# Altium PCB Controller-Board-Rev5.PcbDoc
Units mm, origin at the board's own origin, x right, y up, seen from the top; angles counter-clockwise.
Board outline 35 x 30 mm, 2 copper layers (Component Side, Bottom Layer), stack 0.325 mm thick; 36 components, 50 nets, 202 pads, 58 vias.
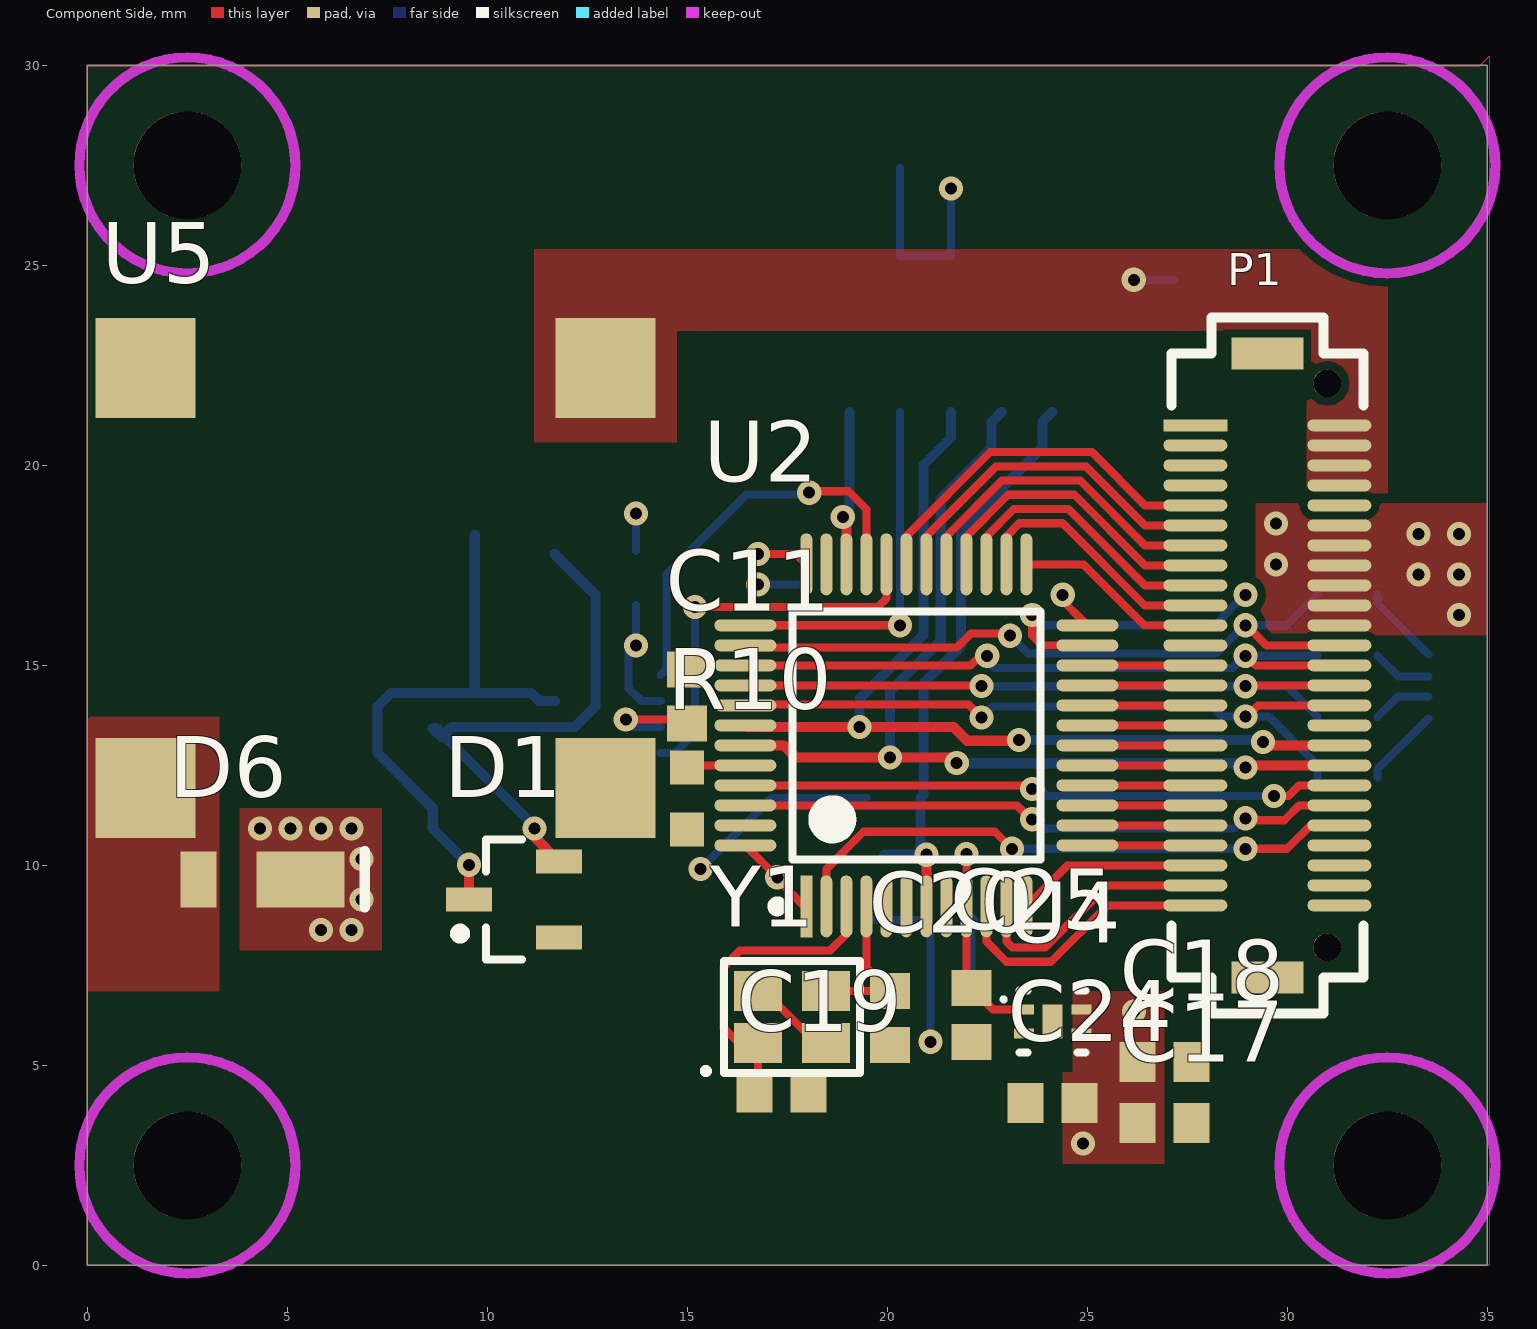
[diagram p0: Component Side view]
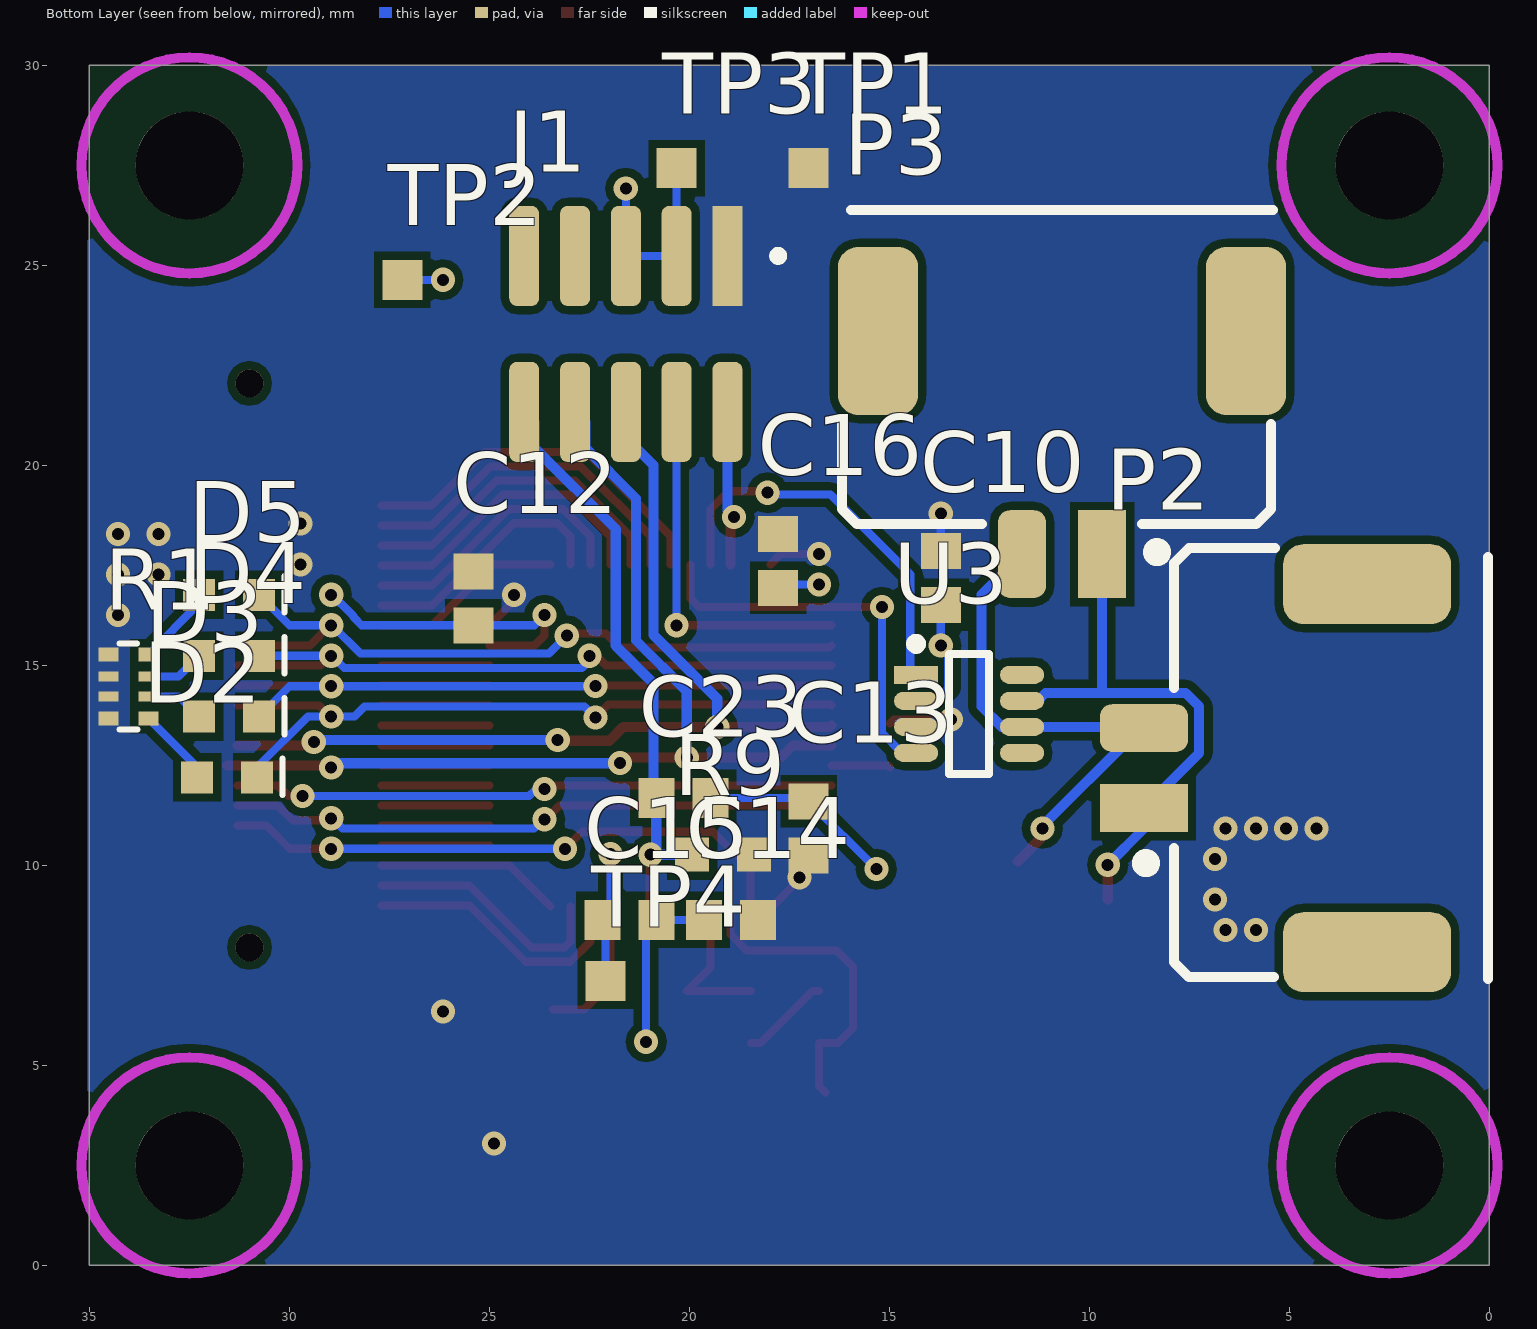
[diagram p1: Bottom Layer view, seen from below]
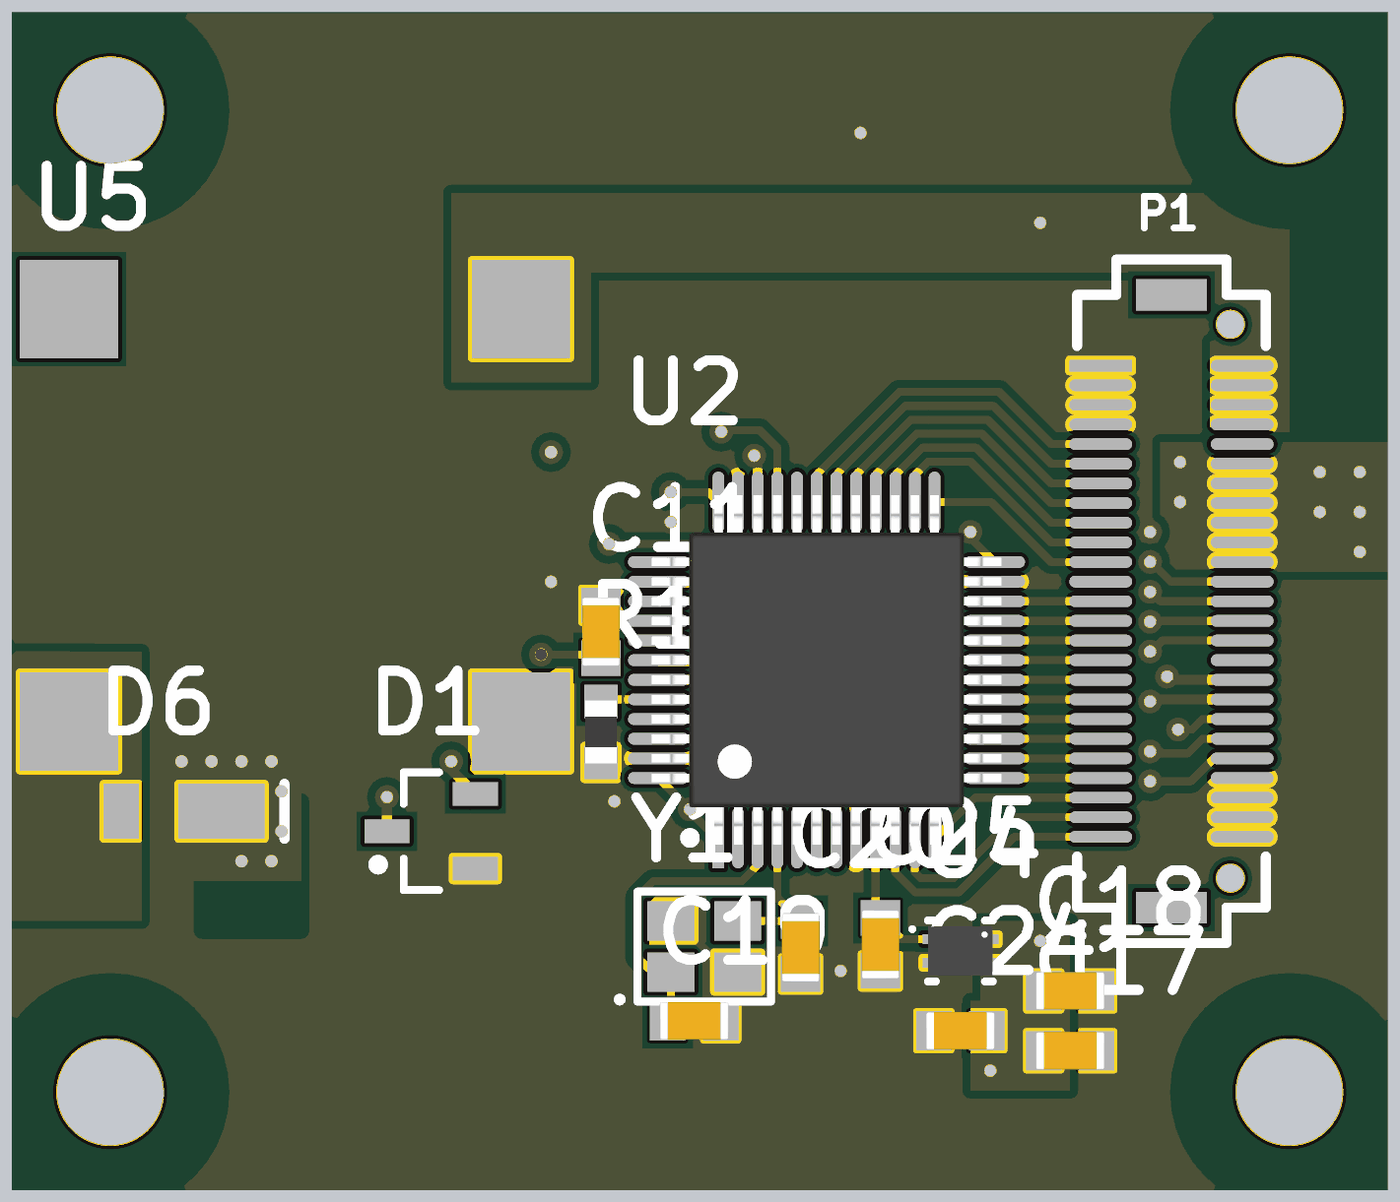
[diagram p2: 3D render of the assembled board from above, using the file's embedded part models]
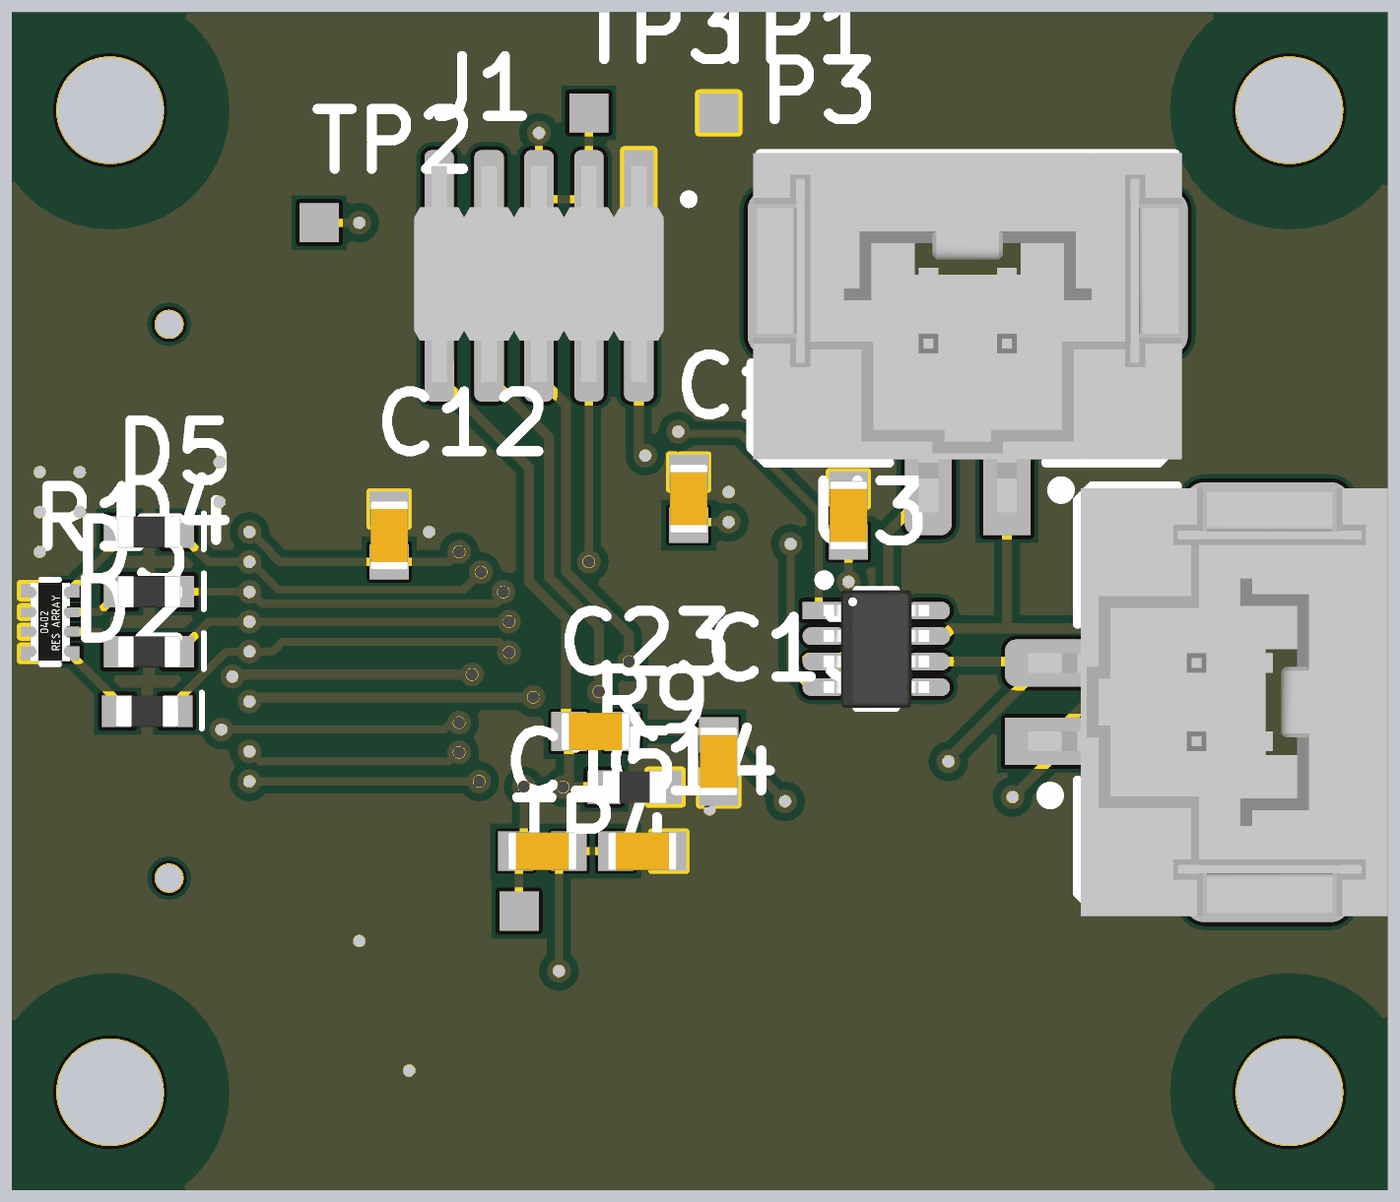
[diagram p3: 3D render of the assembled board from below, using the file's embedded part models]

## Layer stack, top to bottom
Top Solder: solder mask 0.0102, Solder Resist, Dk 3.5
Component Side: signal copper 0.0356
Dielectric 1: core 0.254, FR-4, Dk 4.2
Bottom Layer: signal copper 0.0356
Solder Side: solder mask 0.0102, Solder Resist, Dk 3.5

## Board outline
0,0 35,0 35,30 0,30

## Design rules (kind name [scope] priority, off if disabled: settings)
Clearance [All] p1: gap=0.152 except(0.2: Arc-Poly Track-Poly SMDPad-Poly THPad-Poly Via-Poly Fill-Poly Poly-Poly Poly-Region Poly-Text)
DiffPairsRouting [All] p1: maxlimit=0.254 minlimit=0.254 mostfreqgap=0.254 toplayer_minwidth=0.254 toplayer_maxwidth=0.381 toplayer_prefwidth=0.254 bottomlayer_minwidth=0.254 bottomlayer_maxwidth=0.381 bottomlayer_prefwidth=0.254 maxuncoupledlength=25
HoleSize [All] p1: absolutevalues=TRUE maxlimit=3 minlimit=0.025 maxpercent=80.000 minpercent=20.000
MinimumSolderMaskSliver [All] p1: minsoldermaskwidth=0
PlaneClearance [All] p1: clearance=0.4
PlaneConnect [All] p1: planeconnectstyle=Direct reliefexpansion=0 reliefentries=4 reliefconductorwidth=0.254 reliefairgap=0.254
PolygonConnect PolygonConnect_Relief [HasFootprint('RESC1608X06N') or HasFootprint('Bergstak 50 Pos Receptacle') or HasFootprint('CAPC1608X06N') or HasFootprint('10 POS 1.27MM RECT CONN')] p1: connectstyle=Relief reliefconductorwidth=0.254 reliefentries=4 polygonreliefangle="90 Angle" airgapwidth=0.2
PolygonConnect PolygonConnect_UFDFN [HasFootprint('10-UFDFN')] p2: connectstyle=Direct reliefconductorwidth=0.254 reliefentries=4 polygonreliefangle="90 Angle" airgapwidth=0.254
PolygonConnect PolygonConnect_Via [IsVia] p3: connectstyle=Direct reliefconductorwidth=0.254 reliefentries=4 polygonreliefangle="90 Angle" airgapwidth=0.254
PolygonConnect [All] p4: connectstyle=Direct reliefconductorwidth=0.254 reliefentries=4 polygonreliefangle="90 Angle" airgapwidth=0.254
RoutingVias [All] p1: holewidth=0.3 width=0.605 viastyle="Through Hole" minholewidth=0.3 minwidth=0.605 maxholewidth=6.3 maxwidth=6.605
SilkToSilkClearance [All] p1: silktosilkclearance=0.15
SilkToSolderMaskClearance [IsPad] p1: minsilkscreentomaskgap=0.15 clearancetoexposedcopper=TRUE
SolderMaskExpansion [All] p1: expansion=0.102
Width [All] p1: maxlimit=1.27 minlimit=0.152 preferedwidth=0.203
23 further rules are at their usual default settings.

## Classes and differential pairs
component class Controller_Board_Main: C10 C11 C12 C13 C14 C15 C16 C17 C18 C19 C20 C23 D1 D2 D3 D4 D5 J1 P1 P2 P3 R1 R9 R10 U2 U3 Y1
component class Controller_Board_Power_Supply: C24 C25 D6 TP1 TP2 TP3 TP4 U4 U5 VIN
differential pair CAN: +CAN_P -CAN_N

## Components (designator, comment, footprint, x,y, rotation, side; value= is the part's Value field where it differs from the comment)
C10 "CAP CER 4.7UF 25V 10% X5R 0603" "CAP, 0603" 13.716,17.185 r90 bottom
C11 "CAP CER 0.1UF 50V 10% X7R 0603" "CAP, 0603" 14.986,14.224 r270 top
C12 "CAP CER 0.1UF 50V 10% X7R 0603" "CAP, 0603" 25.4,16.677 r90 bottom
C13 "CAP CER 0.1UF 50V 10% X7R 0603" "CAP, 0603" 17.018,10.922 r270 bottom
C14 "CAP CER 0.1UF 50V 10% X7R 0603" "CAP, 0603" 18.963,8.636 r180 bottom
C15 "CAP CER 0.1UF 50V 10% X7R 0603" "CAP, 0603" 21.503,8.636 r0 bottom
C16 "CAP CER 0.1UF 50V 10% X7R 0603" "CAP, 0603" 17.78,17.613 r90 bottom
C17 "CAP CER 4.7UF 25V 10% X5R 0603" "CAP, 0603" 26.924,3.556 r180 top
C18 "CAP CER 4.7UF 25V 10% X5R 0603" "CAP, 0603" 26.924,5.08 r180 top
C19 "CAP CER 15PF 50V ±5% NPO 0603" "CAP, 0603" 17.359,4.318 r180 top
C20 "CAP CER 15PF 50V ±5% NPO 0603" "CAP, 0603" 20.066,6.183 r90 top
C23 "CAP CER 0.1UF 50V 10% X7R 0603" "CAP, 0603" 20.153,11.684 r0 bottom
C24 "CAP CER 1UF 50V 10% X7R 0603" "CAP, 0603" 24.13,4.064 r180 top
C25 "CAP CER 1UF 50V 10% X7R 0603" "CAP, 0603" 22.098,6.263 r270 top
D1 "DIODE TVS 24VWM 70VC SOT23" SOT23 10.668,9.144 r180 top
D2 "LED BLUE CLEAR 2.8V 0603" LED_0603 32.258,12.192 r180 bottom
D3 "LED BLUE CLEAR 2.8V 0603" LED_0603 32.208,13.706 r180 bottom
D4 "LED GREEN CLEAR 2V 0603" LED_0603 32.208,15.23 r180 bottom
D5 "LED RED CLEAR 2V 0603" LED_0603 32.208,16.754 r180 bottom
D6 "DIODE SCHOTTKY 30V 1A POWERDI123" "DIODE SCHOTTKY 30V 1A POWERDI123" 2.784,9.652 r0 top
J1 "CONN 10POS HEADR MALE 0.05\"" "CONN, 10POS 0.05\" Debug Header" 19.05,25.236 r0 bottom
P1 "CONN 50POS Bergstak Receptacle 0.02\"" "CONN, Bergstak 50 Pos Receptacle" 29.5,15 r0 top locked
P2 "Dura-Clik" "CONN, 2POS Dura-Click Vertical" 8.636,11.43 r90 bottom
P3 "Dura-Clik" "CONN, 2POS Dura-Click Vertical" 9.684,17.78 r0 bottom
R1 "510 OHM" "RES ARRAY 4 POS 0804" 35.028,14.724 r0 bottom
R9 "RES 100K OHM 5% 1/8W 0603" "RES, 0603" 19.157,10.267 r180 bottom
R10 "RES 510 OHM 5% 1/10W 0603" "RES, 0603" 14.986,11.671 r90 top
TP1 "Test Point" "Test Point" 17.018,27.432 r90 bottom
TP2 "Test Point" "Test Point" 27.178,24.638 r90 bottom
TP3 "Test Point" "Test Point" 20.32,27.432 r90 bottom
TP4 "Test Point" "Test Point" 22.098,7.112 r90 bottom
U2 "IC MCU 32BIT 128KB FLASH 48LQFP" TSQFP50P890X890X160-48M 20.725,13.25 r90 top locked
U3 "IC CAN Tranceiver TCAN332DCNT" TSOP65P280X145-8N 13.009,13.787 r180 bottom
U4 "IC REG LDO 3V 0.2A 4-TDFN" "IC REG LDO 3V 0.2A 4-TDFN" 23.415,6.396 r270 top
U5 "IC DCDC 3.3V 0.5A 4-SMD" "IC DCDC 3.3V 0.5A 4-SMD" 12.954,22.438 r270 top locked
Y1 "CRYSTAL 32 MHz 8pF 4-SMD" "CX2520DB CRYSTAL" 16.764,5.558 r0 top

## Footprints (in the part's own frame and the unit in brackets; to place one, negate y for a bottom-side part, rotate by r counter-clockwise, add the part's x,y. Pads: shape width x height; smd on the part's side, far side on the other; paste and mask are expansions set on the pad)
"CAP, 0603" [mm] "Chip Capacitor, 2-Leads, Body 1.60x0.81mm, IPC Medium Density"
  rect 0.9x1 smd mask+0.076: 1(-0.675,0) 2(0.675,0)
  body extent -0.87,-0.48 0.88,0.48, height 0.9
"CONN, 2POS Dura-Click Vertical" [mm] "WM7169CT-ND"
  rect 1.2x2.2 smd: 1(0,0)
  rrect50% 1.2x2.2 smd: 2(2,0)
  rrect50% 2x4.2 smd: 3(-3.6,-5.58) 3(5.6,-5.58)
  silkscreen extent -4.28,-8.6 6.5,0.05, body extent -4.45,-8.64 6.45,0.51, height 8
"CONN, 10POS 0.05\" Debug Header" [mm] "Amphenol 10 Positions Header Connector 0.050\" (1.27mm) Surface Mount Gold"
  rect 0.75x2.5 smd: 1(0,0)
  rrect50% 0.75x2.5 smd: 2(0,3.9) 3(1.27,0) 4(1.27,3.9) 5(2.54,0) 6(2.54,3.9) 7(3.81,0) 8(3.81,3.9) 9(5.08,0) 10(5.08,3.9)
  silkscreen extent -1.37,-0.1 -1.17,0.1, body extent -0.63,-0.85 5.72,4.65, height 4.5
"CONN, Bergstak 50 Pos Receptacle" [mm] "Bergstak 50 Position Receptacle"
  rect 1.6x0.3 smd: 1(-1.8,6)
  oval 1.6x0.3 smd: 2(-1.8,5.5) 3(-1.8,5) 4(-1.8,4.5) 5(-1.8,4) 6(-1.8,3.5) 7(-1.8,3) 8(-1.8,2.5) 9(-1.8,2) 10(-1.8,1.5) 11(-1.8,1) 12(-1.8,0.5) 13(-1.8,0) 14(-1.8,-0.5) 15(-1.8,-1) 16(-1.8,-1.5) 17(-1.8,-2) 18(-1.8,-2.5) 19(-1.8,-3) 20(-1.8,-3.5) 21(-1.8,-4) 22(-1.8,-4.5) 23(-1.8,-5) 24(-1.8,-5.5) 25(-1.8,-6) 26(1.8,-6) 27(1.8,-5.5) 28(1.8,-5) 29(1.8,-4.5) 30(1.8,-4) 31(1.8,-3.5) 32(1.8,-3) 33(1.8,-2.5) 34(1.8,-2) 35(1.8,-1.5) 36(1.8,-1) 37(1.8,-0.5) 38(1.8,0) 39(1.8,0.5) 40(1.8,1) 41(1.8,1.5) 42(1.8,2) 43(1.8,2.5) 44(1.8,3) 45(1.8,3.5) 46(1.8,4) 47(1.8,4.5) 48(1.8,5) 49(1.8,5.5) 50(1.8,6)
  rect 1.8x0.8 smd: ""(0,-7.8) ""(0,7.8)
  round 0.7 hole 0.7: ""(1.5,-7.05) ""(1.5,7.05)
  silkscreen extent -2.4,-8.7 2.4,8.7
"CX2520DB CRYSTAL" [mm]
  rect 1.2x1 smd: 1(0,0) 2(1.7,0) 3(1.7,1.3) 4(0,1.3)
  silkscreen extent -1.35,-0.75 2.55,2.05, body extent -0.4,-0.35 2.1,1.65, height 0.5
"DIODE SCHOTTKY 30V 1A POWERDI123" [mm] "Diodes Incorporated DFLS130L-7"
  rect 0.9x1.4 smd: 1(0,0)
  rect 2.2x1.4 smd: 2(2.55,0)
  silkscreen extent 4.15,-0.7 4.15,0.7, body extent 0.1,-1 3.1,1, height 1
"IC DCDC 3.3V 0.5A 4-SMD" [mm] "ROF-78E3.3-0.5SMD-R"
  rect 2.5x2.5 smd: 1(0,0) 2(10.5,0) 3(10.5,-11.5) 4(0,-11.5)
  body extent -1,-12.5 11.5,1, height 1
"IC REG LDO 3V 0.2A 4-TDFN" [mm] "QFN, 4-Leads, Body 1.20x1.60mm, Pitch 0.50mm/1.40mm, Thermal Pad 0.86x0.50mm, IPC Medium Density"
  rect 0.25x0.5 smd: 1(0,0) 2(0.6,0) 3(0.6,1.44) 4(0,1.44)
  rect 0.86x0.5 smd: 5(0.3,0.715)
  silkscreen extent -0.48,-0.56 1.07,1.54, body extent -0.33,-0.11 0.92,1.54, height 0.6
LED_0603 [mm]
  rect 0.8x0.8 smd: 1(-0.05,0.01) 2(1.45,0.01)
  silkscreen extent 2.09,-0.43 2.09,0.48, body extent -0.1,-0.39 1.5,0.41, height 0.55
"RES ARRAY 4 POS 0804" [mm] "Panasonic Electronic Components EXB-N8V511JX"
  rect 0.5x0.35 smd: 1(-1.5,1.05) 4(-1.5,-0.55) 5(-0.5,-0.55) 8(-0.5,1.05)
  rect 0.5x0.25 smd: 2(-1.5,0.5) 3(-1.5,0) 6(-0.5,0) 7(-0.5,0.5)
  silkscreen extent -1.22,-0.82 -0.77,1.33, body extent -1.5,-0.75 -0.5,1.25, height 0.36
"RES, 0603" [mm] "Chip Resistor, 2-Leads, Body 1.60x0.80mm, IPC Medium Density"
  rect 0.85x0.85 smd: 1(-0.775,0) 2(0.775,0)
  body extent -0.8,-0.4 0.8,0.4, height 0.55
SOT23 [mm] "SOT23, 3-Leads, Body 2.9x1.3mm, Pitch 0.95mm, Lead Span 2.3mm - Reverse Pinning, IPC Medium Density"
  rect 1.15x0.6 smd: 1(1.125,0) 2(-1.125,-0.95) 3(-1.125,0.95)
  silkscreen extent -0.2,-1.5 1.47,1.5, body extent -0.7,-1.5 0.7,1.5, height 1.1
"Test Point" [mm]
  rect 1x1 smd: TP(0,0)
TSOP65P280X145-8N [mm] "TSOP, 8-Leads, Body 2.90x1.60mm, Pitch 0.65mm, IPC Medium Density"
  rect 1.1x0.45 smd: 1(-1.325,0.975)
  oval 1.1x0.45 smd: 2(-1.325,0.325) 3(-1.325,-0.325) 4(-1.325,-0.975) 5(1.325,-0.975) 6(1.325,-0.325) 7(1.325,0.325) 8(1.325,0.975)
  silkscreen extent -1.45,-1.5 0.5,1.87, body extent -1.39,-1.5 1.39,1.5, height 1.45
TSQFP50P890X890X160-48M [mm] "TSQFP, 48-Leads, Body 7.00x7.00mm, Pitch 0.50mm, IPC Low Density"
  rect 1.55x0.3 smd: 1(-4.275,2.75)
  oval 1.55x0.3 smd: 2(-4.275,2.25) 3(-4.275,1.75) 4(-4.275,1.25) 5(-4.275,0.75) 6(-4.275,0.25) 7(-4.275,-0.25) 8(-4.275,-0.75) 9(-4.275,-1.25) 10(-4.275,-1.75) 11(-4.275,-2.25) 12(-4.275,-2.75) 25(4.275,-2.75) 26(4.275,-2.25) 27(4.275,-1.75) 28(4.275,-1.25) 29(4.275,-0.75) 30(4.275,-0.25) 31(4.275,0.25) 32(4.275,0.75) 33(4.275,1.25) 34(4.275,1.75) 35(4.275,2.25) 36(4.275,2.75)
  oval 0.3x1.55 smd: 13(-2.75,-4.275) 14(-2.25,-4.275) 15(-1.75,-4.275) 16(-1.25,-4.275) 17(-0.75,-4.275) 18(-0.25,-4.275) 19(0.25,-4.275) 20(0.75,-4.275) 21(1.25,-4.275) 22(1.75,-4.275) 23(2.25,-4.275) 24(2.75,-4.275) 37(2.75,4.275) 38(2.25,4.275) 39(1.75,4.275) 40(1.25,4.275) 41(0.75,4.275) 42(0.25,4.275) 43(-0.25,4.275) 44(-0.75,4.275) 45(-1.25,4.275) 46(-1.75,4.275) 47(-2.25,4.275) 48(-2.75,4.275)
  silkscreen extent -4.4,-3.1 3.1,3.6, body extent -4.45,-4.45 4.45,4.45, height 1.6

## Part data
C10 C17 C18: "4.7µF ±10% 25V Ceramic Capacitor X5R 0603 (1608 Metric)"
C11 C12 C13 C14 C15 C16 C23: "0.10µF ±10% 50V Ceramic Capacitor X7R 0603 (1608 Metric)"
C19 C20: "15pF ±5% 50V Ceramic Capacitor C0G, NP0 0603 (1608 Metric)"
C24 C25: "1µF ±10% 50V Ceramic Capacitor X7R 0603 (1608 Metric)"
D1: "TVS DIODE 24VWM 70VC SOT23"
D2 D3: "Blue 470nm LED Indication - Discrete 2.8V 0603 (1608 Metric)"
D4: "Green 572nm LED Indication - Discrete 2V 0603 (1608 Metric)"
D5: "Red 631nm LED Indication - Discrete 2V 0603 (1608 Metric)"
D6: "Diode Schottky 30V 1A Surface Mount PowerDI™ 123"
J1: "10 Positions Header Connector 0.050\" (1.27mm) Surface Mount Gold"
P1: "50 Position Connector Receptacle, Center Strip Contacts Surface Mount Gold"
P2 P3: library part "CONN 2POS DURA-CLIK 0.079\" VERT", "2 Positions Header, Shrouded Connector 0.079\" (2.00mm) Surface Mount, Vertical Tin"
R1: library part "RES ARRAY 510 OHM 5% 4RES EXB-N8V511JX", "RES ARRAY SMD 510 OHM 5% 4RES EXB-N8V511JX"
R9: "RES SMD 100K OHM 5% 1/10W 0603"
R10: "RES SMD 510 OHM 5% 1/10W 0603"
U2: "ARM® Cortex®-M0 STM32 F0 Microcontroller IC 32-Bit 48MHz 128KB (128K x 8) FLASH 48-LQFP (7x7)"
U3: "1/1 Transceiver CAN SOT-23-8"
U5: "Non-isolated PoL DC-DC Module 3.3V Output 0.5A 5-36V Input"
Y1: "32MHz ±15ppm Crystal 8pF 50 Ohm -40°C ~ 85°C AEC-Q200 Surface Mount 4-SMD, No Lead"

## Free pads (board coordinates)
  round 2.7 hole 2.7: ""(2.5,2.5) ""(2.5,27.5) ""(32.5,2.5) ""(32.5,27.5)

## Via types
v1: diameter 0.605, hole 0.3, Component Side to Bottom Layer, tented both sides, 41 vias
v2: diameter 0.6, hole 0.3, Component Side to Bottom Layer, tented both sides, 17 vias

## Nets (pads, with @x,y where several pads share a name; then routed paths per layer and width w, separated by ;. In a path a pad name is that pad's centre, name@x,y a point inside that pad or via, vN(x,y) a via of type N, cw(c..) or ccw(c..) an arc to the next point about the centre after c; other vN are vias at no path point)
3V3: C10.2 C11.2 C12.2 C13.2 C14.2 C16.2 C17.2 C18.2 C24.1 D6.2 J1.1 P1.40 P1.41 P1.42 P1.43 P1.44 P1.45 R1.5 R1.6 R1.7 R1.8 R9.2 TP1.TP U2.1 U2.24 U2.36 U2.48 U3.3 U4.3 U4.4 | length 8.2
  Component Side w0.203: v1(13.462,13.643) 14.892,13.643 C11.2 ; U2.48 v1(17.248,9.702) 17.248,9.652 17.95,8.95 U2.1 ; v1(16.764,17.78) 17.72,17.78 U2.36 ; v1(24.384,16.764) 24.236,16.764 U2.24
  Bottom Layer w0.203: v1(13.462,13.643) 13.643,13.462 U3.3 ; C10.2 v1(13.716,18.796)
  other v2: 24.892,3.048 26.162,6.35 5.842,8.382 6.604,8.382 6.858,9.144 6.858,10.16 4.318,10.922 5.08,10.922 5.842,10.922 6.604,10.922 34.29,16.256 33.274,17.272 34.29,17.272 29.718,17.526 33.274,18.288 34.29,18.288 29.718,18.542
12V: P1.47 P1.48 P1.49 P1.50 TP2.TP U5.1 | length 1
  Bottom Layer w0.203: v1(26.162,24.638) TP2.TP
BOOT0: R10.2 U2.44 | length 1.5
  Component Side w0.203: R10.2 15.04,12.5 U2.44
CAN_N: D1.2 P2.2 P3.2 U3.6 | length 13.4
  Component Side w0.254: v1(11.176,10.922) 11.176,10.711 D1.2
  Bottom Layer w0.254: v1(11.176,10.922) 11.176,10.985 P2.2@8.906,13.256 ; P3.2 12.7,16.764 12.7,13.97 12.192,13.462 U3.6 9.112,13.462 P2.2@8.906,13.256 ; P2.2@8.906,13.256 8.858,13.208 P2.2 8.731,13.43 P2.2@8.906,13.256
CAN_P: D1.1 P2.1 P3.1 U3.7 | length 14.4
  Component Side w0.254: D1.1 v1(9.543,10.015)
  Bottom Layer w0.254: v1(9.543,10.015) 8.636,10.922 P2.1 7.257,12.809 7.257,13.97 7.596,14.309 9.684,14.309 ; P3.1@9.684,18.256 P3.1 9.684,14.309 ; U3.7 11.296,14.112 11.098,14.309 9.684,14.309
GND: C10.1 C11.1 C12.1 C13.1 C14.1 C15.1 C16.1 C17.1 C18.1 C19.1 C20.1 C23.1 C24.2 C25.2 D1.3 J1.3 J1.5 P1.1 P1.2 P1.3 P1.4 P1.26 P1.27 P1.28 P1.29 R10.1 TP3.TP U2.8 U2.23 U2.35 U2.47 U3.2 U4.2 U4.5 U5.2 Y1.2 Y1.4 | length 28.5
  Component Side w0.203: Y1.4 16.923,6.858 18.223,5.558 Y1.2 ; v1(23.622,16.256) 23.622,15.748 23.87,15.5 U2.23
  Bottom Layer w0.203: C10.1 v1(13.716,15.494) 13.53,15.308 13.53,14.432 13.85,14.112 U3.2 ; v1(15.327,9.906) C13.1 17.105,11.684 C23.1 ; v1(16.764,17.018) C16.1@17.78,17.018 ; C14.1 C15.1 21.082,8.382 v1(21.082,5.588) ; TP3.TP J1.3 J1.5 v1(21.59,26.924) ; v1(23.622,16.256) 23.876,16.002 C12.1 28.194,16.002 28.4,16.208 28.4,16.232 28.726,16.558 28.75,16.558 v1(28.956,16.764)
NetD2_1: D2.1 R1.1 | length 2
  Bottom Layer w0.203: D2.1@32.258,12.192 32.258,12.404 R1.1
NetD3_1: D3.1 R1.2 | length 1.5
  Bottom Layer w0.203: D3.1 32.766,14.224 R1.2
NetD4_1: D4.1 R1.3 | length 1.5
  Bottom Layer w0.203: D4.1 32.774,14.724 R1.3
NetD5_1: D5.1 R1.4 | length 2
  Bottom Layer w0.203: D5.1 32.258,16.544 R1.4
NetD6_1: D6.1 U5.3
NRST: C23.2 J1.10 R9.1 U2.7 | length 14.8
  Component Side w0.254: U2.7 v1(20.975,10.267)
  Bottom Layer w0.254: R9.1 v1(20.975,10.267) 20.828,10.414 C23.2 20.902,11.758 20.902,14.552 21.844,15.494 21.844,18.41 23.876,20.442 23.876,21.082 J1.10
PA0: P1.25 U2.10 | length 6.9
  Component Side w0.203: U2.10 22.475,8.096 22.98,7.591 24.093,7.591 25.502,9 P1.25
PA1: P1.24 U2.11 | length 6.3
  Component Side w0.203: U2.11 22.975,8.098 23.127,7.946 23.946,7.946 25.5,9.5 P1.24
PA2/USART2_TX: P1.23 U2.12 | length 4.6
  Component Side w0.203: U2.12 24.5,10 P1.23
PA3/USART2_RX: P1.22 U2.13 | length 2.7
  Component Side w0.203: U2.13 25.877,10.5 P1.22
PA4/SPI1_NSS: P1.21 U2.14 | length 2.7
  Component Side w0.203: U2.14 25.877,11 ; 25.877,11 P1.21
PA5/SPI1_SCK: P1.20 U2.15 | length 2.7
  Component Side w0.203: U2.15 25.876,11.5 P1.20
PA6/SPI1_MISO: P1.19 U2.16 | length 2.7
  Component Side w0.203: U2.16 25.877,12 P1.19
PA7/SPI1_MOSI: P1.18 U2.17 | length 2.7
  Component Side w0.203: U2.17 25.877,12.5 P1.18
PA8: P1.7 U2.29 | length 8.2
  Component Side w0.203: U2.29 21.475,18.228 22.866,19.619 24.822,19.619 26.442,18 P1.7
PA9: P1.6 U2.30 | length 8.8
  Component Side w0.203: U2.30 20.975,18.23 22.719,19.975 24.969,19.975 26.444,18.5 P1.6
PA10: P1.5 U2.31 | length 9.4
  Component Side w0.203: U2.31 20.475,18.232 22.572,20.33 25.116,20.33 26.446,19 P1.5
PA11/CAN_RX: U2.32 U3.4 | length 9.9
  Component Side w0.203: v1(15.189,16.459) 19.761,16.459 19.975,16.673 U2.32
  Bottom Layer w0.203: U3.4 14.686,12.812 15.189,13.315 v1(15.189,16.459)
PA12/CAN_TX: U2.33 U3.1 | length 10
  Component Side w0.203: v1(18.046,19.316) 18.082,19.352 19.026,19.352 19.475,18.904 U2.33
  Bottom Layer w0.203: U3.1 14.478,14.906 14.478,17.272 16.474,19.268 17.998,19.268 v1(18.046,19.316)
PA13/SWDIO: J1.2 U2.34 | length 3.9
  Component Side w0.254: v1(18.885,18.707) 18.975,18.617 U2.34
  Bottom Layer w0.254: v1(18.885,18.707) 19.05,18.871 J1.2
PA14/SWCLK: J1.4 U2.37 | length 9.2
  Component Side w0.203: U2.37 16.452,16.002 v1(20.32,16.002)
  Bottom Layer w0.203: v1(20.32,16.002) J1.4
PA15: D5.2 P1.39 U2.38 | length 17.8
  Component Side w0.203: U2.38 16.506,15.444 21.739,15.444 22.092,15.796 23.011,15.796 v1(23.066,15.741) ; v1(28.956,16.002) 28.981,16.002 29.483,15.5 P1.39
  Bottom Layer w0.203: v1(23.066,15.741) 23.514,15.294 28.223,15.294 28.931,16.002 v1(28.956,16.002) 29.996,16.002 D5.2
PB0: P1.17 U2.18 | length 2.7
  Component Side w0.203: U2.18 26.798,13 P1.17
PB1: P1.16 U2.19 | length 2.7
  Component Side w0.203: U2.19 26.798,13.5 P1.16
PB2: P1.15 U2.20 | length 2.7
  Component Side w0.203: U2.20 26.798,14 P1.15
PB3: D4.2 P1.38 U2.39 | length 17.3
  Component Side w0.203: U2.39 22.083,15 22.322,15.24 v1(22.497,15.24) ; v1(28.956,15.24) 28.981,15.24 29.221,15 P1.38
  Bottom Layer w0.203: v1(22.497,15.24) 22.382,15.24 22.683,14.938 28.63,14.938 28.931,15.24 v1(28.956,15.24) D4.2
PB4: D3.2 P1.37 U2.40 | length 17
  Component Side w0.203: U2.40 22.334,14.5 v1(22.352,14.482) ; v1(28.956,14.478) 28.978,14.5 P1.37
  Bottom Layer w0.203: v1(22.352,14.482) 22.356,14.478 v1(28.956,14.478) 29.996,14.478 D3.2
PB5: D2.2 P1.36 U2.41 | length 17.9
  Component Side w0.203: U2.41 16.468,14.018 22.029,14.018 v1(22.352,13.696) ; v1(28.956,13.72) 28.985,13.72 29.265,14 P1.36
  Bottom Layer w0.203: v1(22.352,13.696) 22.626,13.97 28.122,13.97 28.372,13.72 v1(28.956,13.72) 29.54,13.72 30.758,12.502 D2.2@30.758,12.192
PB6/USART1_TX: J1.6 P1.34 U2.42 | length 24
  Component Side w0.254: U2.42 16.488,13.462 v1(19.304,13.462) 21.651,13.462 21.999,13.114 23.274,13.114 v1(23.294,13.134) ; v1(29.39,13.083) v1@29.391,13.082 ; v1@29.464,13.082 v1@29.391,13.082 ; P1.34 29.473,13 v1@29.391,13.082
  Bottom Layer w0.254: v1(19.304,13.462) 19.304,14.163 20.902,15.761 20.902,20.008 21.59,20.696 J1.6 ; v1(23.294,13.134) 29.339,13.134 v1(29.39,13.083)
PB7/USART1_RX: J1.8 P1.33 U2.43 | length 25.1
  Component Side w0.254: U2.43 17.412,13 17.712,12.7 v1(20.066,12.7) 21.59,12.7 v1(21.734,12.556) ; v1(28.956,12.446) 29.01,12.5 P1.33 P1.33@31.554,12.5
  Bottom Layer w0.254: v1(20.066,12.7) 20.066,14.351 21.336,15.621 21.336,19.172 22.606,20.442 22.606,21.082 J1.8 ; v1(21.734,12.556) 21.738,12.552 28.85,12.552 v1(28.956,12.446)
PB8/I2C1_SCL: P1.32 U2.45 | length 15.1
  Component Side w0.203: U2.45 23.532,12 v1(23.622,11.91) ; v1(29.67,11.732) 30.026,11.732 30.294,12 P1.32
  Bottom Layer w0.203: v1(23.622,11.91) 23.66,11.871 23.868,11.871 24.007,11.732 v1(29.67,11.732)
PB9/I2C1_SDA: P1.31 U2.46 | length 15.4
  Component Side w0.203: U2.46 23.245,11.5 23.592,11.152 v1(23.622,11.152) ; v1(28.956,11.176) 29.21,11.176 29.258,11.128 29.924,11.128 30.296,11.5 P1.31
  Bottom Layer w0.203: v1(23.622,11.152) 23.652,11.152 23.882,10.922 28.677,10.922 28.931,11.176 v1(28.956,11.176)
PB10/USART3_TX/I2C2_SCL: P1.14 U2.21 | length 2.7
  Component Side w0.203: U2.21 P1.14
PB11/USART3_RX/I2C2_SDA: P1.13 U2.22 | length 2.7
  Component Side w0.203: U2.22 P1.13
PB12/SPI2_NSS: P1.11 U2.25 | length 4.9
  Component Side w0.203: U2.25 23.476,17.526 24.907,17.526 26.433,16 P1.11
PB13/SPI2_SCK: P1.10 U2.26 | length 6.4
  Component Side w0.203: U2.26 22.975,18.221 23.308,18.554 24.381,18.554 26.435,16.5 P1.10
PB14/SPI2_MISO: P1.9 U2.27 | length 7
  Component Side w0.203: U2.27 22.475,18.224 23.161,18.909 24.528,18.909 26.437,17 P1.9
PB15/SPI2_MOSI: P1.8 U2.28 | length 7.6
  Component Side w0.203: U2.28 21.975,18.226 23.013,19.264 24.675,19.264 26.439,17.5 P1.8
PC13: P1.30 U2.2 | length 14.6
  Component Side w0.203: U2.2 18.475,9.908 19.406,10.839 22.689,10.839 v1(23.114,10.414) ; v1(28.956,10.414) 29.991,10.414 30.577,11 P1.30
  Bottom Layer w0.203: v1(23.114,10.414) v1(28.956,10.414)
PC14/OSC32_IN: C19.2 U2.3 Y1.1 | length 7.9
  Component Side w0.203: C19.2@16.597,4.318 16.764,4.485 Y1.1 16.286,5.558 15.91,5.934 15.91,7.463 16.321,7.874 18.57,7.874 18.975,8.279 U2.3
PC15/OSC32_OUT: C20.2 U2.4 Y1.3 | length 4
  Component Side w0.203: Y1.3 C20.2 19.475,7.449 U2.4
PF0/OSC_IN: U2.5
PF1/OSC_OUT: U2.6
VDDA: C15.2 C25.1 TP4.TP U2.9 U4.1 | length 8.2
  Component Side w0.203: v1(21.975,10.283) U2.9 21.975,7.061 C25.1 22.64,6.396 U4.1
  Bottom Layer w0.203: v1(21.975,10.283) 21.975,8.839 C15.2 22.098,8.556 TP4.TP
pads on no net: J1.7 J1.9 P1. P1.12 P1.35 P1.46 P2.3 P3.3 U3.5 U3.8 U5.4

## Polygon pours and split planes (outlines as drawn)
3V3 on Component Side "3V3_L01_P044" (solid, remove dead copper, pour order 44): 3.81,11.43 3.81,7.874 7.366,7.874 7.366,11.43
3V3 on Component Side "3V3_L01_P046" (solid, remove dead copper, pour order 46): 29.21,15.748 35,15.748 35,19.05 29.21,19.05
3V3 on Component Side "3V3_L01_P045" (solid, remove dead copper, pour order 45): 24.638,6.858 26.924,6.858 26.924,2.54 24.384,2.54 24.384,4.826 24.638,4.826
12V on Component Side "12V_L01_P048" (solid, remove dead copper, pour order 48): 30.48,19.304 32.512,19.304 32.512,25.4 11.176,25.4 11.176,20.574 14.732,20.574 14.732,23.368 30.48,23.368
NetD6_1 on Component Side "NETD6_1_L01_P047" (solid, remove dead copper, pour order 47): 0,13.73 0,6.858 3.302,6.858 3.302,13.712
GND on Component Side "NONET_L01_P049" (solid, remove dead copper, shelved, pour order 49): 0,29.972 34.798,29.972 35.052,30.226 35.052,0 0,0
3V3 on Bottom Layer "3V3_L02_P050" (solid, remove dead copper, pour order 50): 0,30.226 0.254,29.972 35.052,29.972 35.052,0 0,0

## Keep-outs
Keep-Out Layer:
  circle w0.254: c2.5,2.5 r2.7
  circle w0.254: c32.5,2.5 r2.7
  circle w0.254: c32.5,27.5 r2.7
  circle w0.254: c2.5,27.5 r2.7